# Altium PCB Copy of corePCB2.PcbDoc
Units mil, origin at the board's own origin, x right, y up, seen from the top; angles counter-clockwise.
Board outline 6000 x 4000 mil, 4 copper layers (Top Layer, Layer 1, Layer 2, Bottom Layer), stack 23.756 mil thick; 90 components, 166 nets, 637 pads, 133 vias.
Unrouted connection lines stored in the file: 333.
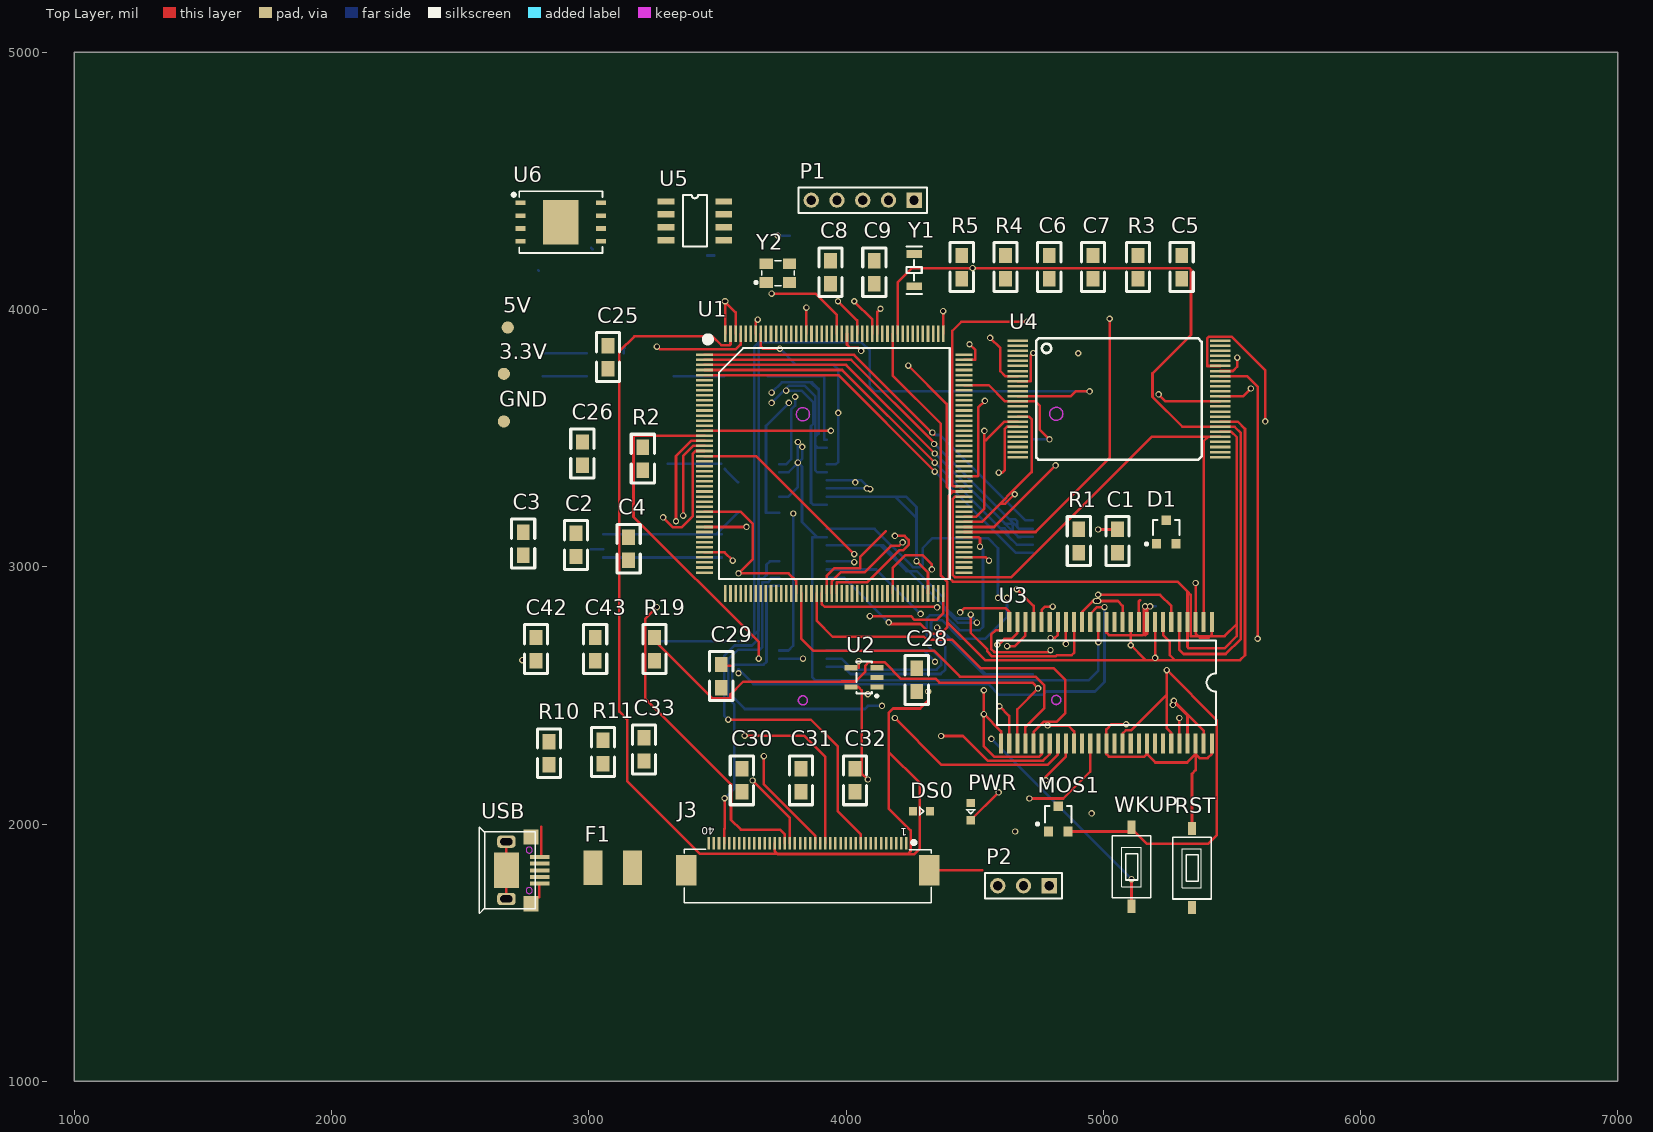
[diagram p0: Top Layer view]
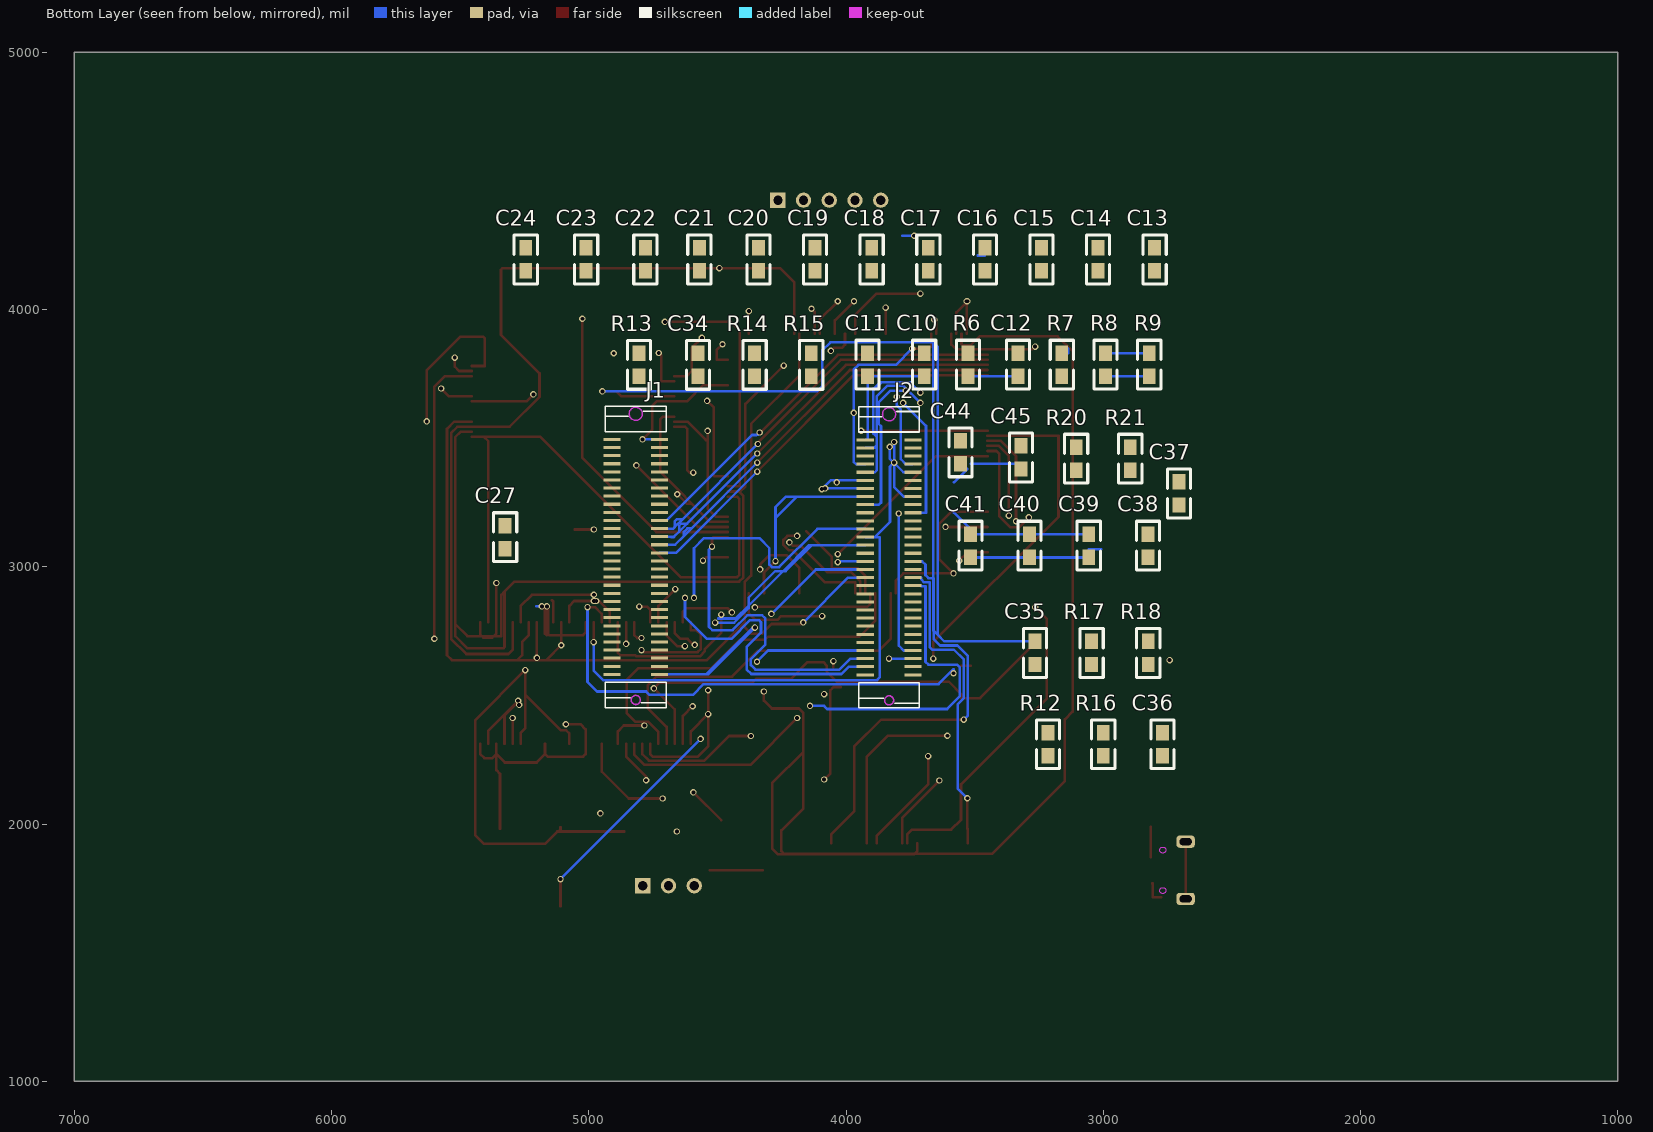
[diagram p1: Bottom Layer view, seen from below]
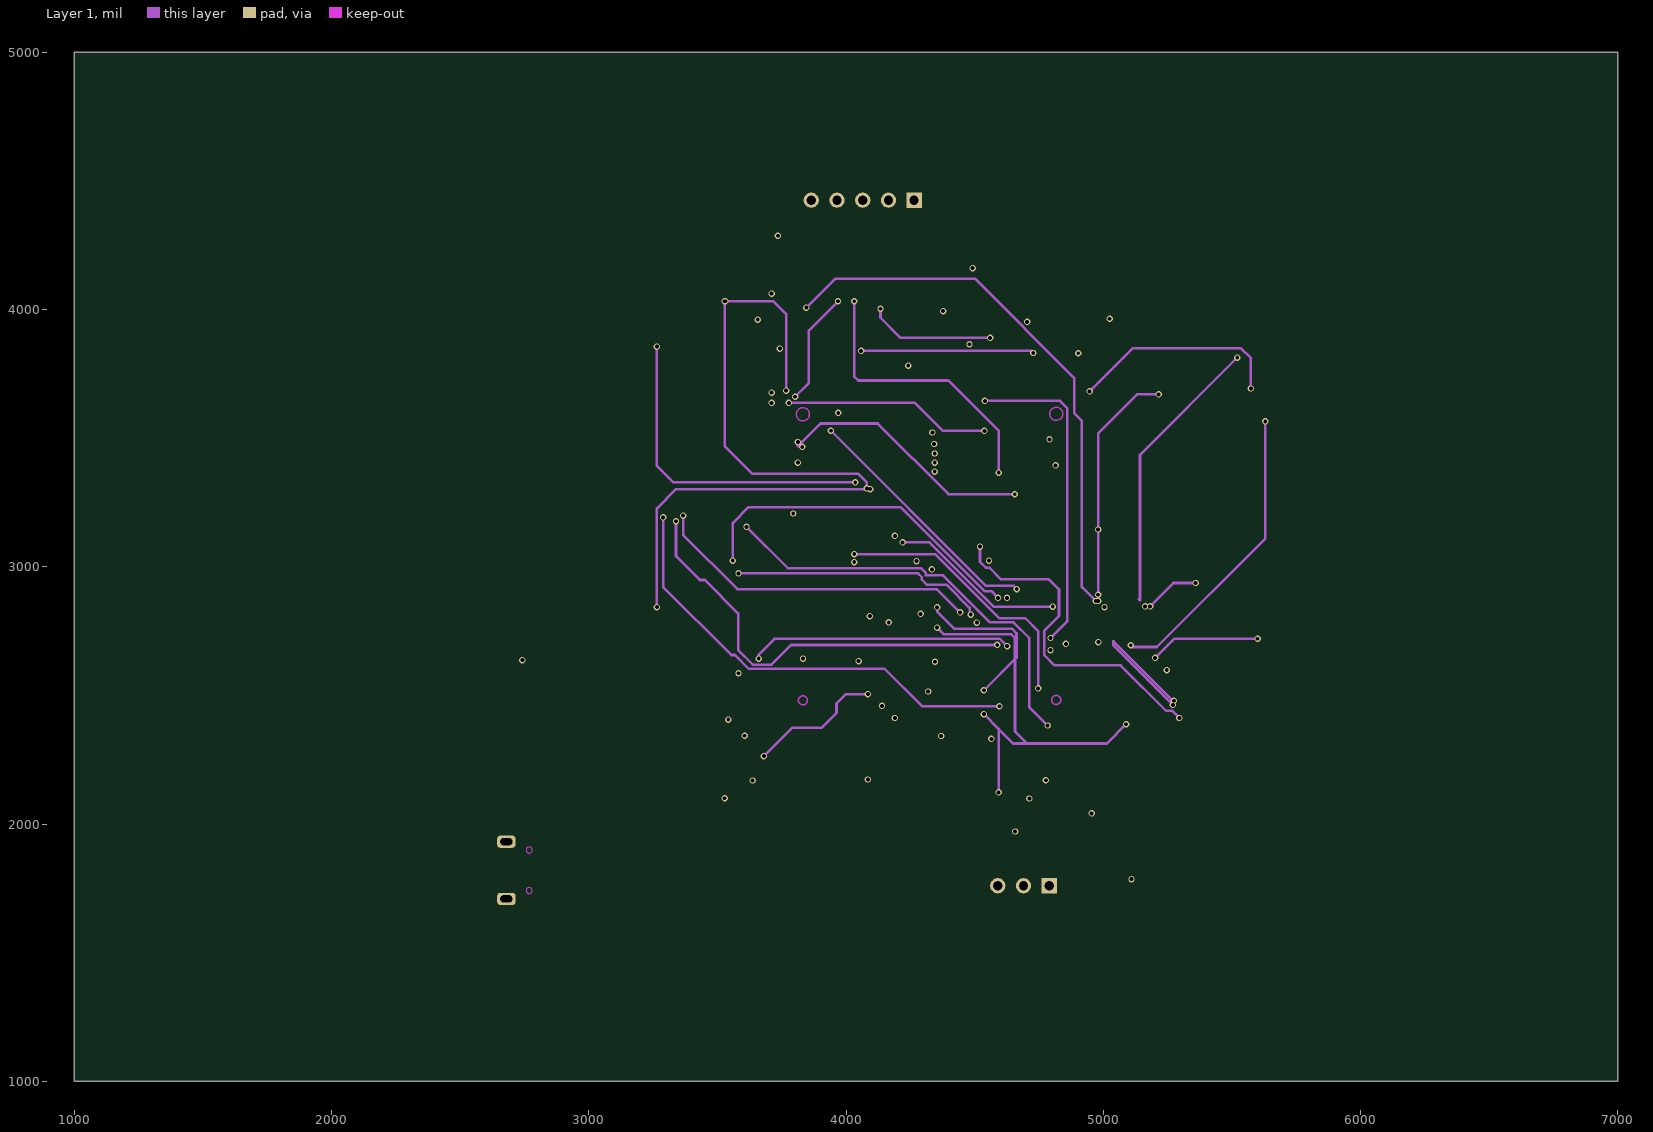
[diagram p2: Layer 1]
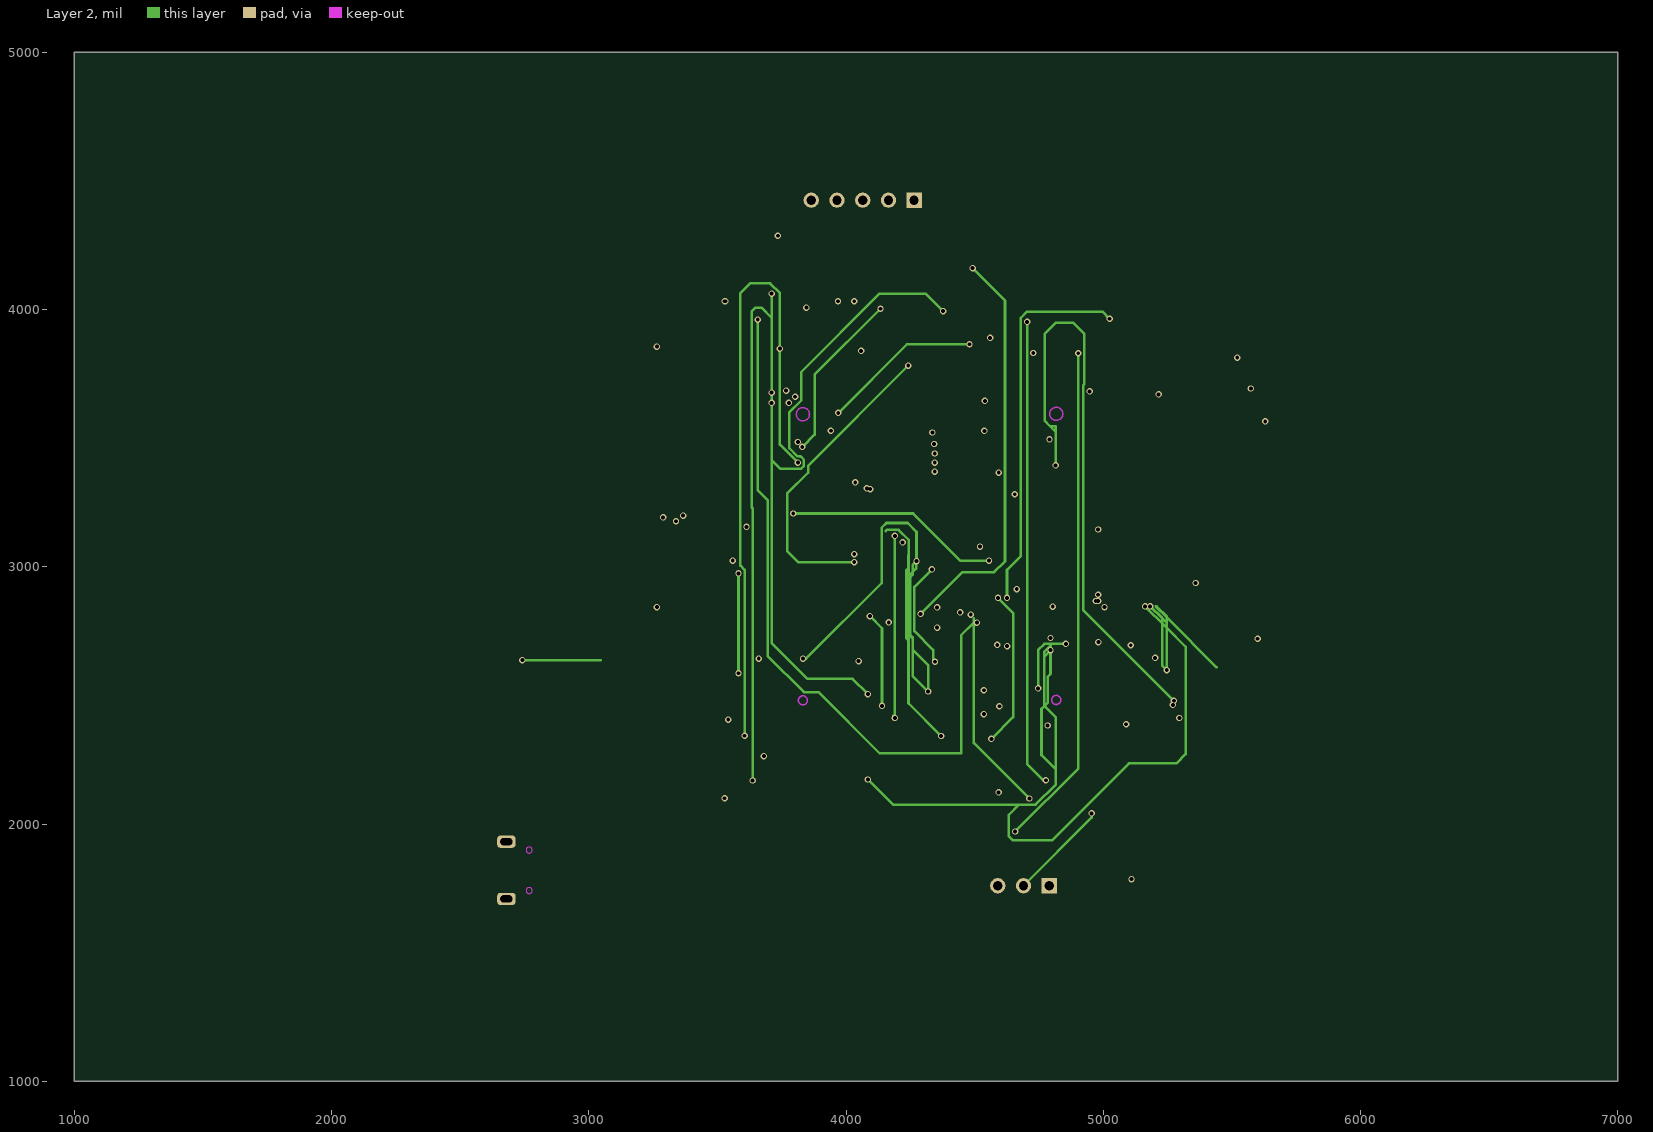
[diagram p3: Layer 2]

## Layer stack, top to bottom
Top Solder: solder mask 0.4, Solder Resist, Dk 3.5
Top Layer: signal copper 1.4
Dielectric 2: prepreg 2.8, PP-006, Dk 4.1
Layer 1: signal copper 1.3779
Dielectric 1: dielectric 12.6, FR-4, Dk 4.8
Layer 2: signal copper 1.3779
Dielectric 3: prepreg 2.8, PP-006, Dk 4.1
Bottom Layer: signal copper 1.4
Bottom Solder: solder mask 0.4, Solder Resist, Dk 3.5

## Board outline
1000,1000 7000,1000 7000,5000 1000,5000

## Design rules (kind name [scope] priority, off if disabled: settings)
Clearance [All] p1: gap=6 ignorepadtopadclearanceinfootprint=TRUE except(0: Arc-Hole Track-Hole SMDPad-Hole THPad-Hole Via-Hole Fill-Hole Poly-Hole Region-Hole Text-Hole)
ComponentClearance [All] p1 off: gap=10 collisioncheckmode=3 verticalgap=10 showdistances=FALSE
DiffPairsRouting [All] p1 off: maxlimit=10 minlimit=10 mostfreqgap=10 toplayer_minwidth=15 toplayer_maxwidth=15 toplayer_prefwidth=15 midlayer1_minwidth=15 midlayer1_maxwidth=15 midlayer1_prefwidth=15 midlayer2_minwidth=15 midlayer2_maxwidth=15 midlayer2_prefwidth=15 bottomlayer_minwidth=15 bottomlayer_maxwidth=15 bottomlayer_prefwidth=15 maxuncoupledlength=500
FanoutControl Fanout_BGA [IsBGA] p1 off: bgadir=Out bgaviamode=Centered fanoutstyle=Auto fanoutdirection=Alternating viagrid=1 // Fanout_BGA (Default Rule)
FanoutControl Fanout_LCC [IsLCC] p2 off: bgadir=Out bgaviamode=Centered fanoutstyle=Auto fanoutdirection=Alternating viagrid=1 // Fanout_LCC (Default Rule)
FanoutControl Fanout_SOIC [IsSOIC] p3 off: bgadir=Out bgaviamode=Centered fanoutstyle=Auto fanoutdirection=Alternating viagrid=1 // Fanout_SOIC (Default Rule)
FanoutControl Fanout_Small [(CompPinCount < 5)] p4 off: bgadir=Out bgaviamode=Centered fanoutstyle=Auto fanoutdirection=OutThenIn viagrid=1 // Fanout_Small (Default Rule)
FanoutControl Fanout_Default [All] p5 off: bgadir=Out bgaviamode=Centered fanoutstyle=Auto fanoutdirection=Alternating viagrid=1 // Fanout_Default (Default Rule)
Height [All] p1 off: minheight=0 maxheight=1000 prefheight=500
PolygonConnect [All] p1: connectstyle=Relief reliefconductorwidth=10 reliefentries=4 polygonreliefangle="90 Angle" airgapwidth=10
RoutingCorners [All] p1 off: cornerstyle=45-Degree minsetback=100 maxsetback=100
RoutingLayers [All] p1 off: top layer_v5=TRUE mid layer 1_v5=TRUE mid layer 2_v5=TRUE bottom layer_v5=TRUE
RoutingPriority [All] p1 off: routingpriority=0
RoutingTopology [All] p1 off: topology=Shortest
RoutingVias [All] p1: holewidth=15 width=25 viastyle="Through Hole" minholewidth=15 minwidth=25 maxholewidth=15 maxwidth=25
SMDToCorner [All] p1: distance=0
SolderMaskExpansion [All] p1: expansion=4
Width [All] p1 off: maxlimit=10 minlimit=10 preferedwidth=10
18 further rules are at their usual default settings.

## Classes and differential pairs
component class stm: C1 C2 C3 C4 C5 C6 C7 C8 C9 C10 C11 C12 C13 C14 C15 C16 C17 C18 C19 C20 C21 C22 C23 C24 C25 C26 C27 D1 J1 J2 P1 R1 R2 R3 R4 R5 R6 R7 R8 R9 RST U1 Y1 Y2
component class mem: C35 C36 C37 C38 C39 C40 C41 C42 C43 C44 C45 R16 R17 R18 R19 R20 R21 U3 U4 U5 U6
component class circuit: 3.3V 5V C28 C29 C30 C31 C32 C33 C34 DS0 F1 GND J3 MOS1 P2 PWR R10 R11 R12 R13 R14 R15 U2 USB WKUP

## Components (designator, comment, footprint, x,y, rotation, side; value= is the part's Value field where it differs from the comment)
3.3V "TEST POINT" TP-1.5 2670,3750 r90 top
5V "TEST POINT" TP-1.5 2685,3930 r0 top
C1 "104" 0805 5055,3055 r90 top
C2 "104" 0805 2950,3040 r90 top
C3 "225" 0805 2745,3045 r90 top
C4 "225" 0805 3155,3025 r90 top
C5 "225" 0805 5305,4120 r90 top
C6 "10uF" 0805 4790,4120 r90 top
C7 "104" 0805 4960,4120 r90 top
C8 "6pF" 0805 3940,4100 r90 top
C9 "6pF" 0805 4110,4100 r90 top
C10 "22pF" 0805 3696.13,3740.59 r90 bottom
C11 "22pF" 0805 3916.13,3740.59 r90 bottom
C12 "104" 0805 3331.13,3740.59 r90 bottom
C13 "104" 0805 2800.13,4150 r90 bottom
C14 "104" 0805 3020.13,4150 r90 bottom
C15 "104" 0805 3240.13,4150 r90 bottom
C16 "104" 0805 3460.13,4150 r90 bottom
C17 "104" 0805 3680.13,4150 r90 bottom
C18 "104" 0805 3900.13,4150 r90 bottom
C19 "104" 0805 4120.13,4150 r90 bottom
C20 "104" 0805 4340.13,4150 r90 bottom
C21 "104" 0805 4570.13,4150 r90 bottom
C22 "104" 0805 4780.13,4150 r90 bottom
C23 "104" 0805 5010.13,4150 r90 bottom
C24 "104" 0805 5245.13,4150 r90 bottom
C25 "104" 0805 3074.94,3770 r90 top
C26 "104" 0805 2975,3395 r90 top
C27 "104" 0805 5325,3070 r90 bottom
C28 "104" 0805 4274.94,2515 r90 top
C29 "10uF" 0805 3514.94,2530 r90 top
C30 "103" 0805 3595,2125 r90 top
C31 "104" 0805 3825,2125 r90 top
C32 "10uF" 0805 4035,2125 r90 top
C33 "104" 0805 3214.94,2245 r90 top
C34 "104" 0805 4575.13,3740 r90 bottom
C35 "104" 0805 3265.13,2620 r90 bottom
C36 "104" 0805 2770.13,2265 r90 bottom
C37 "104" 0805 2705.06,3240 r90 bottom
C38 "104" 0805 2826.45,3036.93 r90 bottom
C39 "104" 0805 3056.45,3036.93 r90 bottom
C40 "104" 0805 3286.45,3036.93 r90 bottom
C41 "104" 0805 3516.45,3036.93 r90 bottom
C42 "104" 0805 2795,2635 r90 top
C43 "104" 0805 3025,2635 r90 top
C44 "104" 0805 3555.13,3400 r90 bottom
C45 "104" 0805 3320.13,3380 r90 bottom
D1 "BAT54C" SOT-23 5245,3130 r0 top
DS0 "LED" SMDLED-0603 4260,2050 r0 top
F1 "1812L075PR" *1812 3093.23,1830 r0 top
GND "TEST POINT" TP-1.5 2670,3565 r90 top
J1 "3710M060046G3FT01" 3710F060046G3FT01 4910,2581.61 r0 bottom
J2 "3710M060046G3FT01" 3710F060046G3FT01 3925.04,2580.04 r0 bottom
J3 "RGBLCD" FPC-TOP40 4234.65,1929 r180 top
MOS1 "SI2301" SO-G3/C2.5 4825,2020 r0 top
P1 "SWD" HDR1X5 4265,4425 r180 top
P2 "USART1" HDR1X3 4790,1760 r180 top
PWR "LED" SMDLED-0603 4485,2081.93 r270 top
R1 "10K" 0805 4905,3055 r90 top
R2 "10R" 0805 3209.94,3375 r90 top
R3 "10R" 0805 5135,4120 r90 top
R4 "0R" 0805 4620,4120 r90 top
R5 "0R" 0805 4450,4120 r90 top
R6 "10K" 0805 3526.13,3740.59 r90 bottom
R7 "100K" 0805 3161.13,3740.59 r90 bottom
R8 "0R" 0805 2991.13,3740.59 r90 bottom
R9 "0R" 0805 2821.13,3740.59 r90 bottom
R10 "1K" 0805 2844.94,2230 r90 top
R11 "10R" 0805 3055,2235 r90 top
R12 "10R" 0805 3215.06,2265 r90 bottom
R13 "10R" 0805 4805.13,3740 r90 bottom
R14 "100K" 0805 4355.13,3740 r90 bottom
R15 "1K" 0805 4135.13,3740 r90 bottom
R16 "0R" 0805 3000.13,2265 r90 bottom
R17 "10K" 0805 3045.13,2620 r90 bottom
R18 "10K" 0805 2825.13,2620 r90 bottom
R19 "10K" 0805 3255,2635 r90 top
R20 "4.7K" 0805 3105.13,3375 r90 bottom
R21 "4.7K" 0805 2895.13,3375 r90 bottom
RST "KEY_M" KEY_SOP3625 5345,1675 r90 top
U1 "STM32F767IGT6" LQFP176 3450,3824.02 r0 top
U2 "CAT6219-330TD" SOT-23-5 4120,2532.6 r180 top
U3 "W9825G6KH" TSOP54 5421.97,2785 r270 top
U4 "MT29F4G08" TSOP48 4667.6,3879.01 r0 top
U5 "24C02" SOP-8 3300.59,4420 r0 top
U6 "W25Q256" WSON8 2891.5,4340 r0 top
USB "USB-AB" "USB_AB - 5S - B" 2595,1820 r90 top
WKUP "KEY_UP" KEY_SOP3625 5110,1680 r90 top
Y1 "32.768KHz" XTAL3215 4265,4090 r90 top
Y2 "25Mhz" XTAL3225 3690,4105 r0 top

## Footprints (in the part's own frame and the unit in brackets; to place one, negate y for a bottom-side part, rotate by r counter-clockwise, add the part's x,y. Pads: shape width x height; smd on the part's side, far side on the other; paste and mask are expansions set on the pad)
0805 [mil]
  rect 60x50 smd: 1(0,-0.06) 2(90,-0.06)
  silkscreen extent -50,-45 140,45
3710F060046G3FT01 [mm]
  rect 1.7x0.3 smd: 1(-4.7,0) 2(-4.7,-0.8) 3(-4.7,-1.6) 4(-4.7,-2.4) 5(-4.7,-3.2) 6(-4.7,-4) 7(-4.7,-4.8) 8(-4.7,-5.6) 9(-4.7,-6.4) 10(-4.7,-7.2) 11(-4.7,-8) 12(-4.7,-8.8) 13(-4.7,-9.6) 14(-4.7,-10.4) 15(-4.7,-11.2) 16(-4.7,-12) 17(-4.7,-12.8) 18(-4.7,-13.6) 19(-4.7,-14.4) 20(-4.7,-15.2) 21(-4.7,-16) 22(-4.7,-16.8) 23(-4.7,-17.6) 24(-4.7,-18.4) 25(-4.7,-19.2) 26(-4.7,-20) 27(-4.7,-20.8) 28(-4.7,-21.6) 29(-4.7,-22.4) 30(-4.7,-23.2) 31(0,-23.2) 32(0,-22.4) 33(0,-21.6) 34(0,-20.8) 35(0,-20) 36(0,-19.2) 37(0,-18.4) 38(0,-17.6) 39(0,-16.8) 40(0,-16) 41(0,-15.2) 42(0,-14.4) 43(0,-13.6) 44(0,-12.8) 45(0,-12) 46(0,-11.2) 47(0,-10.4) 48(0,-9.6) 49(0,-8.8) 50(0,-8) 51(0,-7.2) 52(0,-6.4) 53(0,-5.6) 54(0,-4.8) 55(0,-4) 56(0,-3.2) 57(0,-2.4) 58(0,-1.6) 59(0,-0.8) 60(0,0)
  Keep-Out Layer circle w0.152: c-2.35,-25.725 r0.65
  Keep-Out Layer circle w0.152: c-2.35,2.525 r0.45
  silkscreen extent -5.35,-26.48 0.65,3.27
*1812 [mm]
  rect 1.9x3.4 smd: 1(-1.95,0) 2(1.95,0)
FPC-TOP40 [mm]
  rect 0.25x1.2 smd: 1(0,0.102) 2(0.5,0.102) 3(1,0.102) 4(1.5,0.102) 5(2,0.102) 6(2.5,0.102) 7(3,0.102) 8(3.5,0.102) 9(4,0.102) 10(4.5,0.102) 11(5,0.102) 12(5.5,0.102) 13(6,0.102) 14(6.5,0.102) 15(7,0.102) 16(7.5,0.102) 17(8,0.102) 18(8.5,0.102) 19(9,0.102) 20(9.5,0.102) 21(10,0.102) 22(10.5,0.102) 23(11,0.102) 24(11.5,0.102) 25(12,0.102) 26(12.5,0.102) 27(13,0.102) 28(13.5,0.102) 29(14,0.102) 30(14.5,0.102) 31(15,0.102) 32(15.5,0.102) 33(16,0.102) 34(16.5,0.102) 35(17,0.102) 36(17.5,0.102) 37(18,0.102) 38(18.5,0.102) 39(19,0.102) 40(19.5,0.102)
  rect 2x3 smd: A(-2.25,2.754) B(21.725,2.754)
  silkscreen extent -2.45,-0.15 21.92,5.97
HDR1X3 [mm]
  rect 1.5x1.5 hole 0.9: 1(0,0)
  round 1.5 hole 0.9: 2(2.54,0) 3(5.08,0)
  silkscreen extent -1.27,-1.27 6.35,1.27
HDR1X5 [mm]
  rect 1.5x1.5 hole 0.9: 1(0,0)
  round 1.5 hole 0.9: 2(2.54,0) 3(5.08,0) 4(7.62,0) 5(10.16,0)
  silkscreen extent -1.27,-1.27 11.43,1.27
KEY_SOP3625 [mm]
  rect 1.3x0.8 smd: 1(0,0) 2(7.8,0)
  silkscreen extent 0.85,-1.9 6.95,1.9
LQFP176 [mm]
  rect 1.65x0.254 smd: 1(0,0) 2(0,-0.5) 3(0,-1) 4(0,-1.5) 5(0,-2) 6(0,-2.5) 7(0,-3) 8(0,-3.5) 9(0,-4) 10(0,-4.5) 11(0,-5) 12(0,-5.5) 13(0,-6) 14(0,-6.5) 15(0,-7) 16(0,-7.5) 17(0,-8) 18(0,-8.5) 19(0,-9) 20(0,-9.5) 21(0,-10) 22(0,-10.5) 23(0,-11) 24(0,-11.5) 25(0,-12) 26(0,-12.5) 27(0,-13) 28(0,-13.5) 29(0,-14) 30(0,-14.5) 31(0,-15) 32(0,-15.5) 33(0,-16) 34(0,-16.5) 35(0,-17) 36(0,-17.5) 37(0,-18) 38(0,-18.5) 39(0,-19) 40(0,-19.5) 41(0,-20) 42(0,-20.5) 43(0,-21) 44(0,-21.5) 89(25.631,-21.5) 90(25.631,-21) 91(25.631,-20.5) 92(25.631,-20) 93(25.631,-19.5) 94(25.631,-19) 95(25.631,-18.5) 96(25.631,-18) 97(25.631,-17.5) 98(25.631,-17) 99(25.631,-16.5) 100(25.631,-16) 101(25.631,-15.5) 102(25.631,-15) 103(25.631,-14.5) 104(25.631,-14) 105(25.631,-13.5) 106(25.631,-13) 107(25.631,-12.5) 108(25.631,-12) 109(25.631,-11.5) 110(25.631,-11) 111(25.631,-10.5) 112(25.631,-10) 113(25.631,-9.5) 114(25.631,-9) 115(25.631,-8.5) 116(25.631,-8) 117(25.631,-7.5) 118(25.631,-7) 119(25.631,-6.5) 120(25.631,-6) 121(25.631,-5.5) 122(25.631,-5) 123(25.631,-4.5) 124(25.631,-4) 125(25.631,-3.5) 126(25.631,-3) 127(25.631,-2.5) 128(25.631,-2) 129(25.631,-1.5) 130(25.631,-1) 131(25.631,-0.5) 132(25.631,0)
  rect 0.254x1.65 smd: 45(2.065,-23.566) 46(2.566,-23.566) 47(3.066,-23.566) 48(3.565,-23.566) 49(4.066,-23.566) 50(4.565,-23.566) 51(5.066,-23.566) 52(5.565,-23.566) 53(6.066,-23.566) 54(6.565,-23.566) 55(7.066,-23.566) 56(7.565,-23.566) 57(8.066,-23.566) 58(8.565,-23.566) 59(9.066,-23.566) 60(9.565,-23.566) 61(10.066,-23.566) 62(10.565,-23.566) 63(11.066,-23.566) 64(11.565,-23.566) 65(12.066,-23.566) 66(12.565,-23.566) 67(13.066,-23.566) 68(13.565,-23.566) 69(14.066,-23.566) 70(14.565,-23.566) 71(15.066,-23.566) 72(15.566,-23.566) 73(16.066,-23.566) 74(16.566,-23.566) 75(17.065,-23.566) 76(17.566,-23.566) 77(18.065,-23.566) 78(18.566,-23.566) 79(19.065,-23.566) 80(19.566,-23.566) 81(20.065,-23.566) 82(20.566,-23.566) 83(21.065,-23.566) 84(21.566,-23.566) 85(22.065,-23.566) 86(22.566,-23.566) 87(23.065,-23.566) 88(23.566,-23.566) 133(23.566,2.065) 134(23.065,2.065) 135(22.566,2.065) 136(22.065,2.065) 137(21.566,2.065) 138(21.065,2.065) 139(20.566,2.065) 140(20.065,2.065) 141(19.566,2.065) 142(19.065,2.065) 143(18.566,2.065) 144(18.065,2.065) 145(17.566,2.065) 146(17.065,2.065) 147(16.566,2.065) 148(16.066,2.065) 149(15.566,2.065) 150(15.066,2.065) 151(14.565,2.065) 152(14.066,2.065) 153(13.565,2.065) 154(13.066,2.065) 155(12.565,2.065) 156(12.066,2.065) 157(11.565,2.065) 158(11.066,2.065) 159(10.565,2.065) 160(10.066,2.065) 161(9.565,2.065) 162(9.066,2.065) 163(8.565,2.065) 164(8.066,2.065) 165(7.565,2.065) 166(7.066,2.065) 167(6.565,2.065) 168(6.066,2.065) 169(5.565,2.065) 170(5.066,2.065) 171(4.565,2.065) 172(4.066,2.065) 173(3.565,2.065) 174(3.066,2.065) 175(2.566,2.065) 176(2.065,2.065)
  silkscreen extent 0.04,-22.15 24.22,1.82
SMDLED-0603 [mil]
  rect 32x32 smd: 1(0,0) 2(66.93,0)
  silkscreen extent 26,-17 42,17
SO-G3/C2.5 [mm]
  rect 0.9x0.95 smd: 1(-0.95,-1.25) 2(0.95,-1.25) 3(0,1.25)
  silkscreen extent -2.15,-0.63 1.3,1.25
SOP-8 [mil]
  rect 65x25 smd: 1(0,0) 2(0,-50) 3(0,-100) 4(0,-150) 5(224.41,-150) 6(224.41,-100) 7(224.41,-50) 8(224.41,0)
  silkscreen extent 65,-175 159,25
SOT-23 [mm]
  rect 0.9x0.95 smd: 1(-0.95,-1.048) 2(0.95,-1.048) 3(0,1.302)
  silkscreen extent -2.07,-1.17 1.3,1.3
SOT-23-5 [mil]
  rect 50x20 smd: 1(0,0) 2(0,-37.4) 3(0,-74.8) 4(100,-74.8) 5(100,0)
  silkscreen extent 0,-99 80,35
TP-1.5 [mm]
  round 1.2 smd: 1(0,0)
TSOP48 [mm]
  rect 2x0.25 smd: 1(0,0) 2(0,-0.5) 3(0,-1) 4(0,-1.5) 5(0,-2) 6(0,-2.5) 7(0,-3) 8(0,-3.5) 9(0,-4) 10(0,-4.5) 11(0,-5) 12(0,-5.5) 13(0,-6) 14(0,-6.5) 15(0,-7) 16(0,-7.5) 17(0,-8) 18(0,-8.5) 19(0,-9) 20(0,-9.5) 21(0,-10) 22(0,-10.5) 23(0,-11) 24(0,-11.5) 25(20,-11.5) 26(20,-11) 27(20,-10.5) 28(20,-10) 29(20,-9.5) 30(20,-9) 31(20,-8.5) 32(20,-8) 33(20,-7.5) 34(20,-7) 35(20,-6.5) 36(20,-6) 37(20,-5.5) 38(20,-5) 39(20,-4.5) 40(20,-4) 41(20,-3.5) 42(20,-3) 43(20,-2.5) 44(20,-2) 45(20,-1.5) 46(20,-1) 47(20,-0.5) 48(20,0)
  silkscreen extent 1.83,-11.75 18.17,0.25
TSOP54 [mm]
  rect 2x0.4 smd: 1(0,0) 2(0,-0.8) 3(0,-1.6) 4(0,-2.4) 5(0,-3.2) 6(0,-4) 7(0,-4.8) 8(0,-5.6) 9(0,-6.4) 10(0,-7.2) 11(0,-8) 12(0,-8.8) 13(0,-9.6) 14(0,-10.4) 15(0,-11.2) 16(0,-12) 17(0,-12.8) 18(0,-13.6) 19(0,-14.4) 20(0,-15.2) 21(0,-16) 22(0,-16.8) 23(0,-17.6) 24(0,-18.4) 25(0,-19.2) 26(0,-20) 27(0,-20.8) 28(12,-20.8) 29(12,-20) 30(12,-19.2) 31(12,-18.4) 32(12,-17.6) 33(12,-16.8) 34(12,-16) 35(12,-15.2) 36(12,-14.4) 37(12,-13.6) 38(12,-12.8) 39(12,-12) 40(12,-11.2) 41(12,-10.4) 42(12,-9.6) 43(12,-8.8) 44(12,-8) 45(12,-7.2) 46(12,-6.4) 47(12,-5.6) 48(12,-4.8) 49(12,-4) 50(12,-3.2) 51(12,-2.4) 52(12,-1.6) 53(12,-0.8) 54(12,0)
  silkscreen extent 1.83,-21.2 10.16,0.4
"USB_AB - 5S - B" [mm]
  rect 0.4x1.9 smd: 1(1.3,-5.436) 2(0.65,-5.436) 3(0,-5.436) 4(-0.65,-5.436) 5(-1.3,-5.436)
  rrect50% 1.2x1.8 hole 0.7 slot 1.2 at 90 deg: 6(2.825,-2.15) 7(-2.825,-2.15)
  rect 1.5x1.5 smd: 8(-3.302,-4.572) 9(3.302,-4.572)
  rect 3.5x2.5 smd: 9(0,-2.159)
  Keep-Out Layer circle w0.102: c2,-4.4 r0.3
  Keep-Out Layer circle w0.102: c-2,-4.4 r0.3
  silkscreen extent -4.26,-5 4.26,0.51
WSON8 [mm]
  rect 1x0.45 smd: 1(-3.975,1.905) 2(-3.975,0.635) 3(-3.975,-0.635) 4(-3.975,-1.905) 5(3.975,-1.905) 6(3.975,-0.635) 7(3.975,0.635) 8(3.975,1.905)
  rect 3.5x4.4 smd: 9(0,0)
  silkscreen extent -4.8,-3.05 4.1,3.05
XTAL3215 [mm]
  rect 0.75x1.5 smd: 1(0,0) 2(3.2,0)
  silkscreen extent -0.74,-0.75 3.94,0.75
XTAL3225 [mm]
  rect 1.3x1.05 smd: 1(0,0) 2(2.3,0) 3(2.3,1.85) 4(0,1.85)
  silkscreen extent -1.14,-0.33 2.74,2.17

## Part data
3.3V 5V GND: library part TEST-POINT, "测试点"
C1 C2 C3 C4 C5 C6 C7 C8 C9 C10 C11 C12 C13 C14 C15 C16 C17 C18 C19 C20 C21 C22 C23 C24 C25 C26 C27 C28 C29 C30 C31 C32 C33 C34 C35 C36 C37 C38 C39 C40 C41 C42 C43 C44 C45: library part C
D1: "双肖特基二极管"
F1: "PTC Resettable Fuse 0.75A_hold_ 1.5A_trip_ 13.2VDC 100A 0.8W 0.2s 0.1Ohm SMD Solder Pad 1812 T/R", Package="1812 Littelfuse", Availability=Unavailable, MF="Littelfuse Inc.", MP=1812L075PR, Price=None, SnapEDA_Link=https://www.snapeda.com/parts/1812L075PR/Littelfuse%20Inc./view-part/?ref=snap
J1 J2: library part 3710F, "3710F060046G3FT01"
J3: library part FPC-40, "FPC-40P-0.5mm"
MOS1: library part MOS-P, "IRLML6401/SI2301"
P1: library part "Header 5", "Header, 5-Pin", LatestRevisionDate=17-Jul-2002, LatestRevisionNote="Re-released for DXP Platform.", Publisher="Altium Limited"
P2: library part "Header 3", "Header, 3-Pin", LatestRevisionDate=17-Jul-2002, LatestRevisionNote="Re-released for DXP Platform.", Publisher="Altium Limited"
R1 R2 R3 R4 R5 R6 R7 R8 R9 R10 R11 R12 R13 R14 R15 R16 R17 R18 R19 R20 R21: library part R
U2: "3.3V 500mA LDO"
U3: library part IS42S16160B, "32MB SDRAM"
U4: library part K9F2G08U0C, "256MB NAND FLASH"
U5: library part 24C256, "EEPROM"
U6: library part W25Q128, "W25Q128"
USB: "MicroUSB"
WKUP: library part KEY_M
Y1: library part XTAL, "普通晶振"
Y2: library part XTAL_3225, "3225贴片无源晶振"

## Via types
v1: diameter 25, hole 15, Top Layer to Bottom Layer, 133 vias

## Nets (pads, with @x,y where several pads share a name; then routed paths per layer and width w, separated by ;. In a path a pad name is that pad's centre, name@x,y a point inside that pad or via, vN(x,y) a via of type N, cw(c..) or ccw(c..) an arc to the next point about the centre after c; other vN are vias at no path point)
1WIRE_DQ: J2.4 U1.92 | length 1515.3
  Top Layer w10: U1.92 4543.39,3036.61 v1(4556,3024)
  Layer 2 w10: v1(3795,3207) 4261,3207 4444,3024 v1(4556,3024)
  Bottom Layer w10: J2.4 3776,2674.53 3795,2693.53 v1(3795,3207)
BOOT0: J1.31 R7.1 U1.166
DCMI_D0: J2.16 U1.115
DCMI_D1: J2.17 U1.116
DCMI_D2: J2.18 U1.117
DCMI_D3: J2.19 U1.118
DCMI_D4: J1.39 U1.140
DCMI_D5: J1.36 U1.145
DCMI_D6: J1.26 U1.167
DCMI_D7: J1.27 U1.168
DCMI_HREF: J2.3 U1.85 | length 1150.6
  Top Layer w10: v1(4274,3022) 4318.72,2977.28 U1.85
  Layer 2 w10: v1(3832.95,2643.03) 3845.06,2643.03 4139,2936.97 4139,3152 4157,3170 4240,3170 4274,3136 v1(4274,3022)
  Bottom Layer w10: J2.3 v1(3832.95,2643.03)
DCMI_PLCK: J1.47 U1.52
DCMI_RESET: J1.25 J1.41 U1.138 U1.165
DCMI_SCL: J1.22 U1.162
DCMI_SDA: J1.21 U1.161
DCMI_XCLK: J2.20 U1.119
ETH_MDC: J1.9 U1.33
ETH_MDIO: J1.4 U1.42
FMC_A0: U1.16 U3.23 | length 1624
  Top Layer w10: U1.16 v1(3941.26,3528.74) ; v1(4663.68,2913.37) 4729.05,2848 U3.23
  Layer 1 w10: v1(3941.26,3528.74) 4543.98,2926.02 4651.03,2926.02 v1(4663.68,2913.37)
FMC_A1: U1.17 U3.24 | length 2502.4
  Top Layer w10: U1.17 3174,3509.06 3174,3194 3661,2707 v1(3661,2643) ; v1(4626.42,2691.52) 4656.52,2691.52 4697.56,2732.56 U3.24
  Layer 1 w10: v1(3661,2643) 3661,2659 3721.5,2719.5 4598.45,2719.5 v1(4626.42,2691.52)
FMC_A2: U1.18 U3.25 | length 2204
  Top Layer w10: v1(3339,3177) 3339,3430.74 3397.63,3489.37 U1.18 ; v1(4588,2696) 4592.49,2696 4616,2719.51 4643.51,2719.51 4666.06,2742.06 U3.25
  Layer 1 w10: v1(3339,3177) 3339,3041.18 3431.66,2948.52 3451.48,2948.52 3581,2819 3581,2676 3637.5,2619.5 3710.53,2619.5 3787.03,2696 v1(4588,2696)
FMC_A3: U1.19 U3.26 | length 1850.8
  Top Layer w10: v1(3367,3199) 3367,3430.69 3406,3469.69 U1.19 ; v1(4443.37,2822.5) 4459.37,2838.5 4621.5,2838.5 4634.57,2825.43 U3.26
  Layer 1 w10: v1(3367,3199) 3367,3124 3577.66,2913.34 4352.53,2913.34 v1(4443.37,2822.5)
FMC_A4: U1.20 U3.29 | length 2372.9
  Top Layer w10: v1(3289,3192) 3328,3153 3360,3153 3405,3198 3405,3440 3415,3450 U1.20 ; v1(4596.57,2458) 4634.57,2420 U3.29
  Layer 1 w10: v1(3289,3192) 3289,2922 3554,2657 3568,2657 3621.5,2603.5 4149.5,2603.5 4295,2458 v1(4596.57,2458)
FMC_A5: U1.21 U3.30 | length 2049.7
  Top Layer w10: U1.21 3650.68,3430.32 v1(4032,3049) ; U3.30 4666.06,2446.06 v1(4747,2527)
  Layer 1 w10: v1(4032,3049) 4346.06,3049 4595.06,2800 4696.87,2800 4747,2749.87 v1(4747,2527)
FMC_A6: U1.60 U3.31 | length 1451.9
  Top Layer w10: U1.60 3826.59,2720 3872.59,2674 4342,2674 4443,2573 4736,2573 4771,2538 4771,2450.44 4697.56,2377 U3.31
FMC_A7: U1.63 U3.32 | length 1496.7
  Top Layer w10: U1.63 3885.65,2790.35 3948,2728 4303,2728 4314.5,2716.5 4412.81,2716.5 4524.31,2605 4808,2605 4853,2560 4853,2432 4818,2397 4768,2397 4729.05,2358.05 U3.32
FMC_A8: U1.64 U3.33 | length 1633
  Top Layer w10: U1.64 3905.33,2856 3917.33,2844 4352,2844 v1(4354,2842) ; v1(4536,2520) 4536,2302 4576,2262 4752,2262 4760.55,2270.55 U3.33
  Layer 1 w10: v1(4354,2842) 4354,2826 4420.5,2759.5 4644.5,2759.5 4662.75,2741.25 4662.75,2646.75 v1(4536,2520)
FMC_A9: U1.65 U3.34 | length 2418.9
  Top Layer w10: U1.65 3925.02,2964.02 3955.5,2994.5 4055.5,2994.5 4055.5,3039.27 4155,3138.77 ; v1(4370,2342) 4454.52,2342 4550.52,2246 4766.05,2246 4792.05,2272 U3.34
  Layer 2 w10: 4155,3138.77 4155,3140 4158.5,3143.5 4204.73,3143.5 4244,3104.23 4244,3046.72 ; v1(4370,2342) 4244,2468 ; 4244,2468 4242.71,2469.29 4242.71,2713.64 4234,2722.36 4234,2986 4242.61,2994.61 4242.61,3045.33 4244,3046.72 ; 4244,2468 4244,3046.72
FMC_A10: U1.66 U3.22 | length 1169
  Top Layer w10: U1.66 3944.7,2944 3979.2,2978.5 4071.55,2978.5 4174.29,3081.24 4206.24,3081.24 v1(4220,3095) ; U3.22 4760.55,2832 4773.55,2845 v1(4804,2845)
  Layer 1 w10: v1(4220,3095) 4324,3095 4574,2845 v1(4804,2845)
FMC_A11: U1.67 U3.35 | length 1948.6
  Top Layer w10: U1.67 3964.39,2940 4083.36,2940 4208,3064.64 4222.87,3064.64 4243.5,3085.27 4243.5,3104.73 4228.23,3120 v1(4190,3120) ; v1(4190,2412) 4372,2230 4784,2230 4823.54,2269.54 U3.35
  Layer 2 w10: v1@4183,2419 4190,2426 ; v1(4190,2412) 4190,2426 ; v1(4190,3120) 4190,2426
FMC_A12: U1.106 U3.36 | length 2948.2
  Top Layer w10: U1.106 4415,3312.21 4413,3314.21 4413,3917 4448,3952 v1(4704,3952) ; v1(4777,2170) 4777,2183.96 4855.04,2262 U3.36
  Layer 2 w10: v1(4704,3952) 4704,2233 4767,2170 v1(4777,2170)
FMC_A16_CLE: J2.23 U1.99 U4.16 | length 2052.3
  Top Layer w10: U1.99 4528.41,3174.41 ; v1(4656,3282) 4618.93,3244.93 4600.13,3244.93 4529.6,3174.41 4528.41,3174.41 ; U4.16 4712,3583.74 4722,3573.74 4722,3368 4528.41,3174.41
  Layer 1 w10: v1(3813,3485) 3813,3469 3901,3557 4123,3557 4398,3282 v1(4656,3282)
  Bottom Layer w10: J2.23 3776,3272.95 3813,3309.95 v1(3813,3485)
FMC_A17_ALE: J2.21 U1.100 U4.17 | length 1873.6
  Top Layer w10: U1.100 4506.09,3194.09 4538,3226 4538,3492.05 ; v1(4538,3528) 4538,3492.05 ; U4.17 4617,3564.05 4545,3492.05 4538,3492.05
  Layer 1 w10: v1(3778,3637) 4268,3637 4377,3528 v1(4538,3528)
  Bottom Layer w10: J2.21 3689,3209.96 3689,3548 v1(3778,3637)
FMC_A18: J2.14 U1.101
FMC_BA0: U1.108 U3.20 | length 1693.1
  Top Layer w10: U1.108 4511,3351.58 4514,3354.58 4514,3619 v1(4540,3645) ; v1(4795,2723) 4811,2723 4823.54,2735.54 U3.20
  Layer 1 w10: v1(4540,3645) 4832,3645 4860,3617 4860,2788 v1(4795,2723)
FMC_BA1: U1.109 U3.21
FMC_D0: J2.45 U1.104 U3.2 U4.29 | length 2339.9
  Top Layer w10: U1.104 4423.83,3272.83 4415,3264 4415,2968 4423,2960 4643,2960 5188,3505 5407.47,3505 ; U3.2 5390.47,3488 5407.47,3505 ; U4.29 5407.47,3505
FMC_D1: J2.46 U1.105 U3.4 U4.30 | length 4852.9
  Top Layer w10: v1(4242,3782) 4391,3633 4391,3312 4413.24,3289.76 ; U1.105 4416,3292.52 4413.24,3289.76 ; U4.30 5498.32,3524.68 5519,3504 5519,2777 ; 4413.24,3289.76 4399,3275.52 4399,2959 4416,2942 5289,2942 5327.48,2903.52 ; 5327.48,2903.52 5340,2891 5340,2785 5340,2730 5472,2730 5519,2777 ; 5327.48,2903.52 U3.4 5327.48,2688 5331.48,2684 5473,2684 5519,2730 5519,2777
  Layer 2 w10: v1(4032,3018) 3814,3018 3771,3061 3771,3284 3852.5,3365.5 3852.5,3392.5 v1(4242,3782)
  Bottom Layer w10: J2.46 4029.02,3020.98 v1(4032,3018)
FMC_D2: J2.47 U1.142 U3.5 U4.31 | length 5543.4
  Top Layer w10: U1.142 4200.61,4105.61 4256,4161 v1(4492,4161) 5334.62,4161 5341.06,4154.56 5341.06,3901.69 5191.5,3752.13 5191.5,3660.27 5307.4,3544.37 U4.31 5510.63,3544.37 5535,3520 5535,2720 5476,2661 5312,2661 5295.98,2677.02 U3.5
  Layer 2 w10: v1(4290,2817) 4452,2979 4576,2979 4618,3021 4618,4035 v1(4492,4161)
  Bottom Layer w10: J2.47 4117.51,2989.49 v1(4290,2817)
FMC_D3: J2.48 U1.143 U3.7 U4.32 | length 4177.6
  Top Layer w10: v1(4165.99,2784) 4172.49,2777.5 4289,2777.5 4326.5,2740 4368,2740 4394,2766 4394,2784 ; U1.143 4180.93,3744.07 4369,3556 4369,2966 4394,2941 4394,2784 ; U3.7 5232.99,2734 5259,2707.99 5259,2656 5278,2637 ; U4.32 5522.95,3564.05 5551,3536 5551,2656 5532,2637 5278,2637 ; 4394,2784 4541,2637 5278,2637
  Bottom Layer w10: J2.48 3992,2957.99 v1(4165.99,2784)
FMC_D4: J2.49 U1.68 U3.8 U4.41 | length 1710.4
  Top Layer w10: v1(5201.5,2646) U3.8 ; U4.41 5559.01,3741.22 5600,3700.23 v1(5600,2720)
  Layer 1 w10: v1(5201.5,2646) 5275.5,2720 v1(5600,2720)
FMC_D5: J2.50 U1.69 U3.10 U4.42 | length 1300.9
  Top Layer w10: U3.10 5138.5,2865 5143,2869.5 ; U4.42 5504,3760.9 5521,3777.9 v1(5521,3813)
  Layer 1 w10: 5138.5,2874.5 5143,2879 ; 5143,2869.5 5143,2879 ; v1(5521,3813) 5143,3435 5143,2879
FMC_D6: J2.51 U1.70 U3.11 U4.43 | length 1961.5
  Top Layer w10: U3.11 v1(5107.01,2695) 5161.01,2641 ; U4.43 5404.63,3780.59 5404.63,3888.49 5411.07,3894.94 5498.93,3894.94 5630,3763.86 v1(5630,3565)
  Layer 1 w10: v1(5107.01,2695) 5114.01,2688 5208.01,2688 5630,3109.99 v1(5630,3565)
FMC_D7: J2.52 U1.73 U3.13 U4.44
FMC_D8: J2.53 U1.74 U3.42
FMC_D9: J2.54 U1.75 U3.44
FMC_D10: J2.55 U1.76 U3.45
FMC_D11: J2.56 U1.77 U3.47
FMC_D12: J2.57 U1.78 U3.48 | length 1166.7
  Top Layer w10: U1.78 4180.93,2995.93 4230.5,3045.5 4297.5,3045.5 4334,3009 v1(4334,2990)
  Layer 2 w10: v1(4334,2990) 4266,2922 4266,2749.5 4338.38,2677.12 4338.38,2638.62 v1(4346,2631)
  Bottom Layer w10: J2.57 4302.47,2674.53 v1(4346,2631)
FMC_D13: J2.58 U1.96 U3.50 | length 2755.4
  Top Layer w10: U1.96 4516,3115.35 4521,3110.35 v1(4521,3078.35) ; U3.50 v1(5295.98,2412)
  Layer 1 w10: v1(4521,3078.35) 4521,3019 4543.82,2996.18 4557.82,2996.18 4603,2951 4789,2951 4828,2912 4828,2808.46 4771,2751.46 4771,2656 4810,2617 5067.48,2617 5244.98,2439.5 5268.48,2439.5 v1(5295.98,2412)
  Bottom Layer w10: J2.58 3982.97,2643.03 4026,2600 4352,2600 4370,2618 4370,2641 4314.5,2696.5 4314.5,2800 4326,2811.5 4383.35,2811.5 4440.85,2754 4520,2754 4532.5,2766.5 4532.5,3066.85 v1(4521,3078.35)
FMC_D14: J2.59 U1.97 U3.51 | length 4680.9
  Top Layer w10: U1.97 4737.04,3135.04 5025,3423 v1(5025,3964) ; v1(5271,2463) 5287,2463 5327.48,2422.52 U3.51
  Layer 1 w10: v1(5271,2463) 5040,2694 5040,2710 5271,2479
  Layer 2 w10: v1(4626,2879) 4626,2988 4680,3042 4680,3968 4704,3992 4997,3992 v1(5025,3964)
  Bottom Layer w10: J2.59 3989,2611.54 4017.54,2583 4368,2583 4386,2601 4386,2688.5 4330.5,2744 4330.5,2784 4338.75,2792.25 4372.69,2792.25 4444.94,2720 4540.94,2720 4626,2805.06 v1(4626,2879)
FMC_D15: J2.60 U1.98 U3.53 | length 3003.8
  Top Layer w10: U1.98 4575.72,3154.72 v1(4815,3394) ; v1(5274.47,2479) 5390.47,2363 U3.53
  Layer 2 w10: v1(4815,3394) 4815,3525 ; v1(5274.47,2479) 4923,2830.47 4923,3706 4927,3710 4927,3904 4882,3949 4817,3949 4772,3904 4772,3568 4794,3546 ; 4794,3546 4815,3546 4815,3525 ; 4794,3546 4815,3525
FMC_NBL0: J2.43 U1.169 U3.15 | length 2841.1
  Top Layer w10: U1.169 3669.11,3856 3677.11,3848 v1(3743,3848) ; v1(4981.02,2707) U3.15
  Layer 2 w10: v1(3743,3848) 3743,3475 v1(3813,3405)
  Bottom Layer w10: v1(3813,3405) 3829,3389 3829,3174.47 3888,3115.47 ; J2.43 3888,3115.47 ; v1(4981.02,2707) 4981.02,2596.02 4944.5,2559.5 3879.5,2559.5 3869,2570 3869,3115.47 3888,3115.47
FMC_NBL1: J2.44 U1.170 U3.39 | length 5240.9
  Top Layer w10: U1.170 3649.43,3953.29 v1(3657,3960.86) ; v1(4713,2099) 4844.53,2099 4949.53,2204 U3.39
  Layer 2 w10: v1(3657,3960.86) 3657,3297 3695,3259 3695,2654 3836,2513 3893,2513 4131,2275 4448,2275 4448,2734 v1@4497,2783 ; 4497,2799 v1@4497,2783 ; v1(4713,2099) 4497,2315 4497,2771 ; 4497,2771 v1@4497,2783 ; 4497,2771 v1(4509,2783) v1@4497,2783
  Bottom Layer w10: J2.44 4133.02,3083.98 ; 4497,2799 4429,2799 4378,2850 ; v1(4509,2783) 4434.48,2783 4378,2839.48 4378,2850 ; 4133.02,3083.98 4144.02,3083.98 4245.5,2982.5 ; 4133.02,3083.98 4234.5,2982.5 4245.5,2982.5 ; 4245.5,2982.5 4378,2850 ; 4245.5,2982.5 4275.5,2982.5 4378,2880 4378,2850
FMC_NCE3: R17.2 U1.152 U4.9 | length 944.3
  Top Layer w10: U1.152 4003.76,3863.24 4016,3851 4047,3851 v1(4059,3839) ; U4.9 4719,3721.53 4719,3822 v1(4728,3831)
  Layer 1 w10: v1(4059,3839) 4720,3839 v1(4728,3831)
FMC_NE1: J1.35 U1.151
FMC_NOE: J2.26 U1.146 U4.8 | length 1638.2
  Top Layer w10: U1.146 4121.87,3990.87 v1(4134,4003) ; v1(4560,3890) 4599.78,3850.22 4599.78,3760 4618.56,3741.22 U4.8
  Layer 1 w10: v1(4134,4003) 4134,3968 4212,3890 v1(4560,3890)
  Layer 2 w10: v1(3830,3466) 3878,3514 3878,3747 v1(4134,4003)
  Bottom Layer w10: J2.26 3776.44,3367.44 3830,3421 v1(3830,3466)
FMC_NWAIT: J2.27 U1.150 U4.7 | length 901.7
  Top Layer w10: v1(3969,4032) 4043.13,3957.87 U1.150
  Layer 1 w10: v1(3802,3661) 3856,3715 3856,3919 v1(3969,4032)
  Bottom Layer w10: J2.27 3768,3398.94 3787,3417.94 3787,3612 3802,3627 v1(3802,3661)
FMC_NWE: J2.22 U1.147 U4.18 | length 1501.3
  Top Layer w10: v1(4032,4032) 4102.19,3961.81 U1.147 ; v1(4594,3366) 4608,3366 4617,3375 4617,3536 4625.37,3544.37 U4.18
  Layer 1 w10: v1(4032,4032) 4032,3740 4048,3724 4398,3724 4594,3528 v1(4594,3366)
FMC_SDCKE0: U1.35 U3.37 | length 1976.6
  Top Layer w10: U1.35 v1(3613.28,3154.72) ; v1(4784,2383) 4864,2383 4886.53,2360.47 U3.37
  Layer 1 w10: v1(3613.28,3154.72) 3773.5,2994.5 4292,2994.5 4310.5,2976 4310.5,2966.5 4377.5,2966.5 4560,2784 4652,2784 4712,2724 4712,2455 v1(4784,2383)
FMC_SDCLK: U1.112 U3.38
FMC_SDNCAS: U1.160 U3.17 | length 2361.4
  Top Layer w10: U1.160 v1(3846.28,4007.28) ; U3.17 4918.03,2825.03 4960,2867 v1(4971,2867)
  Layer 1 w10: v1(3846.28,4007.28) 3959,4120 4501,4120 4887,3734 4887,3597 4917,3567 4917,2921 v1(4971,2867)
FMC_SDNE0: R19.2 U1.34 U3.19 | length 2071.8
  Top Layer w10: R19.2 3255.06,2712.94 3479,2489 3551,2489 3551,2504 3600,2553 3983,2553 3984,2554 4037,2554 4075,2592 4075,2616 4088,2629 4149,2629 4214,2564 4349,2564 4363.19,2549.81 4724.19,2549.81 v1(4747,2527) ; v1(4855.04,2699.97) U3.19
  Layer 2 w10: v1(4747,2527) 4747,2675.94 4771.03,2699.97 v1(4855.04,2699.97)
FMC_SDNRAS: U1.59 U3.18 | length 1913
  Top Layer w10: v1(3582,2974) 3776.91,2974 3806.91,2944 U1.59 ; v1(4485,2814) 4485,2743 4548.5,2679.5 4548.5,2672 4568.48,2652.02 4814.52,2652.02 4818.5,2656 4877.53,2656 4886.53,2665 U3.18
  Layer 1 w10: v1(3582,2974) 4280.5,2974 4294.5,2960 4294.5,2950.5 4315.66,2929.34 4392.03,2929.34 4480.91,2840.46 4480.91,2818.09 v1(4485,2814)
FMC_SDNWE: U1.32 U3.16 | length 2700.8
  Top Layer w10: U1.32 3591.22,3213.78 3637,3168 3637,3029 v1(3582,2974) ; U3.16 4949.53,2816.53 4976,2843 v1(5005,2843)
  Layer 2 w10: v1(3582,2586) 3582,2602 v1(3582,2974)
  Bottom Layer w10: v1(3582,2586) 3582,2602 3590,2594 3640.5,2543.5 4553.5,2543.5 4595,2502 4764,2502 4777,2515 4968,2515 5005,2552 v1(5005,2843)
GBC_KEY: J1.15 U1.13
GBC_LED: J1.45 U1.50
GND: C1.2 C2.1 C3.2 C4.1 C5.2 C6.1 C7.1 C8.1 C9.1 C10.1 C11.1 C12.2 C13.1 C14.1 C15.1 C16.1 C17.1 C18.1 C19.1 C20.1 C21.1 C22.1 C23.1 C24.1 C25.1 C26.1 C27.1 C28.1 C29.1 C30.1 C31.1 C32.1 C33.2 C34.2 C35.1 C36.1 C37.1 C38.1 C39.1 C40.1 C41.1 C42.1 C43.1 C44.2 C45.2 GND.1 J1.1 J1.30 J2.31 J3.3 J3.4 J3.5 J3.11 J3.12 J3.13 J3.20 J3.21 J3.22 J3.23 J3.29 J3.A J3.B P1.1 P2.3 PWR.2 R1.2 R4.2 R7.2 R14.1 RST.2 U1.14 U1.22 U1.37 U1.61 U1.71 U1.90 U1.102 U1.113 U1.126 U1.135 U1.148 U1.158 U2.2 U3.6 U3.12 U3.28 U3.41 U3.46 U3.52 U3.54 U4.13 U4.36 U5.1 U5.2 U5.3 U5.4 U5.7 U6.4 USB.5 USB.6 USB.7 USB.8 USB.9 Y2.2 Y2.4 | length 7571.6
  Top Layer w10: USB.7 2680,1708.78 2680,1820 2680,1931.22 USB.6 ; USB.8@2775,1716 2807,1716 2807,1768.82 USB.5 ; J3.A 4323.23,1821 4529,1821 ; U1.126 4555,3705.91 4618.11,3642.79 U4.13 4736,3642.79 4754,3624.79 4754,3532 v1(4791,3495) ; PWR.2 v1(4593,2123) ; v1(4536,2427) 4603.07,2359.93 U3.28 ; v1(4980,2867) 5056.51,2867 5075.51,2848 U3.12 ; v1(4980,2891) 5221.49,2891 5264.49,2848 U3.6 ; v1(4980,3145) C1.2 ; v1(5089,2388) 5032.52,2388 5012.52,2368 U3.41 5012.52,2272 5022.52,2262 5160,2262 5170,2272 ; U3.46 5170,2272 ; v1(5215,3670) 5242.21,3642.79 U4.36 ; RST.2 5345,2195.05 5358.98,2209.02 5358.98,2272 ; U3.52 5358.98,2272 ; U3.54 5421.97,2272 5405.97,2256 5374.98,2256 5358.98,2272 ; 5170,2272 5203,2239 5325.98,2239 5358.98,2272
  Layer 1 w10: v1(4354,2763.5) 4379.5,2738 4642,2738 4657,2723 4657,2360 4704,2313 ; v1(4536,2427) 4593,2370 ; v1(4593,2123) 4593,2370 ; v1(4980,2867) v1(4980,2891) v1(4980,3145) 4980,3518 5132,3670 v1(5215,3670) ; v1(5089,2388) 5014,2313 4704,2313 ; 4593,2370 4650,2313 4704,2313
  Bottom Layer w10: C13.1@2803.03,4152.97 C13.1@2806,4150 ; 3007.38,3068.62 3056.38,3068.62 ; C39.1 3056.38,3036 3286.38,3036 3516.38,3036 C41.1 ; 3136,3830.59 3136,3847 R7.2@3140.33,3851.33 ; C10.1 3696.07,3740 C11.1@3916.07,3740 ; C11.1 C11.1@3916.07,3740 ; J2.31 3916.07,3493.43 C11.1@3916.07,3740 ; v1(4354,2763.5) 4535.89,2581.61 4544.39,2581.61 ; v1@4354,2772 4544.39,2581.61 ; J1.1 4544.39,2581.61 ; J1.30 v1(4791,3495)
IIC_SCL: J1.8 R20.1 U1.45 U5.6
IIC_SDA: J1.7 R21.1 U1.46 U5.5
JTCK: J1.42 P1.2 U1.137
JTMS: J1.43 P1.3 U1.124
KEY0: J1.6 U1.44
KEY1: J1.5 U1.43
KEY2: J1.28 U1.8
LCD_B3: J2.35 J3.24 U1.154 | length 3564.3
  Top Layer w10: v1(3637,2169) 3781.89,2024.11 J3.24 ; v1(3711,4062) 3881.39,4062 3964.39,3979 U1.154
  Layer 2 w10: v1(3637,2169) 3637,3227 3633,3231 3633,3992 3648,4007 3672,4007 3711,3968 ; v1(3711,3637) 3711,3968 ; v1(3711,4062) 3711,3968
  Bottom Layer w10: v1(3711,3637) 3777,3703 3840,3703 3880,3663 3880,3375.44 3888,3367.44 J2.35
LCD_B4: J2.36 J3.25 U1.173 | length 4329.9
  Top Layer w10: v1(3265,2843) 3219,2797 3219,2488 3553,2154 3553,2016 3591,1978 3744,1978 3762.2,1959.8 J3.25 ; v1(3265,3856) 3275.15,3845.85 3572.23,3845.85 3590.37,3864 U1.173
  Layer 1 w10: v1(3265,2843) 3265,3227 3340,3302 v1(4094,3302) ; v1(3265,3856) 3265,3392 3329,3328 v1(4036,3328)
  Bottom Layer w10: J2.36 4028.06,3335.94 v1(4036,3328) 4036,3335.94 4060.06,3335.94 v1(4094,3302)
LCD_B5: J2.37 J3.26 U1.174 | length 1498.3
  Top Layer w10: v1(3528,4032) 3570.69,3989.31 U1.174
  Layer 1 w10: v1(3528,4032) 3528,3469 3636,3361 4048,3361 4081,3328 v1(4081,3304.45)
  Bottom Layer w10: J2.37 v1(4081,3304.45)
LCD_B6: J2.38 J3.27 U1.175 | length 6789.2
  Top Layer w10: U1.175 3551,3864.86 3548,3861.85 3515,3861.85 3480.85,3896 3177,3896 3119,3838 3119,2437 3149,2407 3149,2168 3433,1884 3734,1884 ; J3.27 3722.83,1895.17 3734,1884 ; v1(4319,2515) 4319,2480 4288,2449 4183,2449 4166,2432 4166,2280 ; 3734,1884 4240,1884 4251,1895 4251,1975 4166,2060 4166,2280 ; 3734,1884 3736,1882 4265,1882 4287,1904 4287,2159 4166,2280
  Layer 2 w10: v1(4274,3022) v1@4273,3021 ; 4250,2734 4250,2730 4258.71,2721.29 ; 4250,2734 4258.71,2725.29 4258.71,2721.29 ; 4250,2734 4250,2961 ; 4250,2961 4250,2970 4259,2979 ; 4250,2961 4259,2970 4259,2979 ; 4258.71,2721.29 4259,2721 4259,2677.71 ; 4258.71,2721.29 4258.71,2678 4259,2677.71 ; 4259,2677.71 4319,2617.71 v1(4319,2515) 4259,2575 4259,2677.71 ; 4259,2979 4273,2993 v1@4273,3021 ; 4259,2979 4259,3007 v1@4273,3021
  Bottom Layer w10: J2.38 4191.05,3272.95 ; v1(4274,3022) 4274,3190 ; 4191.05,3272.95 4233.05,3272.95 4274,3232 4274,3190 ; 4191.05,3272.95 4274,3190
LCD_B7: J2.39 J3.28 U1.176 | length 1263.3
  Top Layer w10: U1.176 v1(3531.32,4032)
  Layer 1 w10: v1(3531.32,4032) 3718,4032 3767,3983 v1(3767,3685)
  Bottom Layer w10: v1(3767,3685) 3827,3685 3873,3639 3873,3556 3864,3547 3864,3249.46 3872,3241.46 J2.39
LCD_BL: J1.23 J3.34 U1.163
LCD_CLK: J3.30 U1.111
LCD_DE: J3.33 U1.28
LCD_G2: J2.30 J3.14 U1.128
LCD_G3: J2.29 J3.15 U1.129
LCD_G4: J2.28 J3.16 U1.130
LCD_G5: J2.34 J3.17 U1.131 | length 4216.3
  Top Layer w10: v1(3606,2343) 3838,2343 3919.69,2261.31 J3.17 ; U1.131 4503,3804.33 4503,3842 v1(4480,3865)
  Layer 2 w10: v1(3606,2343) 3606,2988 3589,3005 3589,4064 3627,4102 3705,4102 3743,4064 v1(3743,3848) ; v1(3970,3598) 4237,3865 v1(4480,3865)
  Bottom Layer w10: v1(3743,3848) 3806,3785 3952,3785 3970,3767 v1(3970,3598) 3970,3408 3960.94,3398.94 J2.34
LCD_G6: J2.33 J3.18 U1.132
LCD_G7: J2.32 J3.19 U1.133 | length 4302.6
  Top Layer w10: v1(3681,2264) 3681,2154 3880.32,1954.68 J3.19 ; U1.133 v1(4377.78,3994)
  Layer 1 w10: v1(3681,2264) 3792,2375 3906,2375 3963,2432 3963,2468 4000,2505 v1(4085,2505)
  Layer 2 w10: v1(3711,3677) 3711,3414.5 ; v1(4085,2505) 4026,2564 3850,2564 3711,2703 3711,3414.5 ; v1(4377.78,3994) 4309.78,4062 4131,4062 3826,3757 3826,3647 3779.96,3600.96 3779.96,3460.66 3811.63,3429 3822,3429 3823,3428 3824.5,3428 3836.5,3416 3836.5,3392 3826,3381.5 3744,3381.5 3711,3414.5
  Bottom Layer w10: v1(3711,3677) 3751,3717 3862,3717 ; J2.32 3891,3461.93 ; 3862,3717 3868,3717 3894,3691 3894,3685 ; 3862,3717 3894,3685 ; 3880,3472.93 3880,3504 ; 3880,3472.93 3880,3469.93 3888,3461.93 3891,3461.93 ; 3880,3472.93 3891,3461.93 ; 3880,3504 3880,3511 3894,3525 ; 3880,3504 3894,3518 3894,3525 ; 3894,3525 3894,3685
LCD_HSYNC: J3.31 U1.12
LCD_R3: J2.10 J3.6 U1.86
LCD_R4: J2.11 J3.7 U1.87
LCD_R5: J2.12 J3.8 U1.88 | length 1954.5
  Top Layer w10: v1(4093,2808) 4252.5,2808 4267,2793.5 4352.28,2793.5 4377.78,2819 U1.88
  Layer 2 w10: v1(4093,2808) 4140,2761 v1(4140,2459)
  Bottom Layer w10: J2.12 3707,2926.5 3707,2923.68 3691,2923.68 3691,2630.5 3680,2619.5 3568,2619.5 3558,2609.5 3558,2496 3607,2447 4073,2447 4085,2459 v1(4140,2459)
LCD_R6: J2.24 J3.9 U1.89
LCD_R7: J2.15 J3.10 U1.110 | length 1665.4
  Top Layer w10: v1(3542,2406) 3863,2406 3968,2301 3968,2049.48 4057.48,1960 J3.10
  Bottom Layer w10: v1(3542,2406) 3526,2422 3526,2653 3567,2694 3634.37,2694 3659,2718.63 3659,2955.68 3679.53,2955.68 3691,2967.14 3691,3008 3703.98,3020.98 J2.15
LCD_VSYNC: J3.32 U1.11
LED0: DS0.2 J1.57 U1.57
LED1: J1.56 U1.56
NetC1_1: C1.1 D1.3 U1.6
NetC2_2: C2.2 C4.2 R2.1 U1.38
NetC3_1: C3.1 U1.81
NetC5_1: C5.1 U1.125
NetC8_2: C8.2 U1.9 Y1.1
NetC9_2: C9.2 U1.10 Y1.2
NetC10_2: C10.2 U1.30 Y2.1
NetC11_2: C11.2 U1.29 Y2.3 | length 45.6
  Bottom Layer w10: v1(3735,4287) 3780.55,4287
NetC28_2: C28.2 J3.1
NetC29_2: C29.2 F1.2 U2.1 U2.3 | length 36
  Top Layer w10: C29.2@3515,2615 3551,2615
NetC30_2: C30.2 U2.4 | length 25.6
  Top Layer w10: 4049,2607.4 v1(4049,2633)
NetC35_2: C35.2 C36.2 R16.1 U4.12 U4.37 | length 5372.5
  Top Layer w10: U4.12 4873.48,3662.48 4893,3682 v1(4947,3682) ; U4.37 5543.48,3662.48 v1(5574,3693)
  Layer 1 w10: v1(4947,3682) 5114,3849 5536,3849 5574,3811 v1(5574,3693)
  Bottom Layer w10: C35.2 3618,2710 3643,2735 ; v1(4947,3682) 4112,3682 4093,3701 4093,3840 4061,3872 3660,3872 ; 3643,2735 3660,2752 3660,3872 ; 3643,2735 3643,3855 3660,3872
NetDS0_1: DS0.1 R10.2
NetMOS1_1: MOS1.1 R13.2 R14.2 | length 1961
  Layer 2 w10: v1(4657.21,1970.79) 4903,2216.58 v1(4903,3830)
NetPWR_1: PWR.1 R15.1
NetR1_1: R1.1 U1.48
NetR4_1: R4.1 R5.1 U1.171
NetR11_2: R11.2 USB.3
NetR12_2: R12.2 USB.2
NetR18_1: R18.1 U4.19 | length 305
  Layer 2 w10: v1(2742,2637) 3047,2637
NRF_CE: J2.25 U1.155
NRF_CS: J1.34 U1.153
PA0: J2.42 U1.40 WKUP.1 | length 3978
  Top Layer w10: U1.40 3527.7,3056.3 v1(3560,3024) ; WKUP.1 v1(5110,1786)
  Layer 1 w10: v1(3560,3024) 3560,3171 3621,3232 4212,3232 4539,2905 4565,2905 v1(4591,2879)
  Layer 2 w10: v1(4565,2331) 4650,2416 4650,2820 v1(4591,2879)
  Bottom Layer w10: J2.42 4111.53,3146.97 4260,2998.5 4288.5,2998.5 4298,3008 4298,3072 4337,3111 4552,3111 4591,3072 v1(4591,2879) ; v1(4565,2331) v1(5110,1786)
PA1: J1.3 U1.41
PA3: J1.44 U1.47
PA5: J1.46 U1.51
PA7: J1.48 U1.53
PA9: J1.51 P2.1 U1.120
PA10: J1.52 P2.2 U1.121 | length 390.8
  Layer 2 w10: P2.2 4955,2025 v1(4955,2041)
PA11: J1.53 R11.1 U1.122
PA12: J1.54 R12.1 U1.123
PB2: J1.55 U1.58 U6.6
PB6: J1.24 U1.164 U6.1
PB10: J2.2 U1.79
PB11: J2.1 U1.80
PB13: J2.5 U1.93
PB14: J2.6 U1.94
PB15: J2.7 U1.95
PC4: J1.49 U1.54
PC5: J1.50 U1.55
PC10: J1.40 U1.139
PC12: J1.38 U1.141
PD2: J1.37 U1.144
PE2: J1.20 U1.1 | length 1564.4
  Top Layer w10: U1.1 3979.02,3824.02 3979.33,3823.7 4031.36,3823.7 v1@4342.53,3512.53
  Bottom Layer w10: v1@4342.53,3512.53 4335.96,3519.11 v1(4335.96,3522.03) 4337.97,3522.03 4338.7,3521.3 4347.87,3512.13 4365.31,3512.13 4697.4,3180.04 J1.20
PE3: J1.19 U1.2 | length 1613.5
  Top Layer w10: U1.2 4020.42,3804.33 v1@4347.38,3477.38
  Bottom Layer w10: J1.19 4671.46,3148.54 4665.98,3154.02 ; v1@4347.38,3472.62 4345,3475 4347.38,3477.38 v1@4347.38,3472.62 ; v1@4347.38,3472.62 4634.53,3185.47 ; 4634.53,3185.47 4665.98,3154.02 ; 4634.53,3185.47 4656.51,3185.47 4665.98,3176 4665.98,3154.02
  other v1: 4342.53,3477.38
PE4: J1.18 U1.3 | length 2052.5
  Top Layer w10: U1.3 4000.73,3784.65 v1(4345,3440.38)
  Bottom Layer w10: v1(4345,3440.38) v1@4345.19,3440.19 ; v1@4345.19,3440.19 4345,3440 4648.18,3136.82 ; v1@4345.19,3440.19 4617.71,3167.67 4640,3167.67 4648.18,3159.49 4648.18,3136.82 ; 4648.18,3136.82 4667.95,3117.05 ; 4667.95,3117.05 4670,3115 4680,3115 4681.14,3116.14 4724.05,3116.14 J1.18 4667.95,3117.05
PE5: J1.17 U1.4 | length 1606.6
  Top Layer w10: U1.4 3985.04,3764.96 v1(4345,3405)
  Bottom Layer w10: v1(4345,3405) 4600.77,3149.23 ; J1.17 4664.45,3085.55 4629.74,3120.26 ; 4600.77,3149.23 4629.74,3120.26 ; 4600.77,3149.23 4616.51,3149.23 4629.74,3136 4629.74,3120.26
PE6: J1.16 U1.5 | length 2008.6
  Top Layer w10: U1.5 3970,3745.28 v1@4345,3370.28
  Bottom Layer w10: J1.16 4661.22,3054.06 ; 4661.22,3054.06 4660.94,3054.06 v1(4345,3370) 4345,3370.28 4661.22,3054.06
PF6: J1.14 U1.24 U6.7
PF7: J1.13 U1.25 U6.3
PF8: J1.12 U1.26 U6.5
PF9: J1.11 U1.27 U6.2
PG3: J2.13 J3.37 U1.107 | length 1222.3
  Top Layer w10: J3.37 3525.98,1980 3528,1982.02 v1(3528,2100)
  Bottom Layer w10: v1(3528,2100) 3566,2138 3566,2465 3542,2489 3542,2638.83 3581.17,2678 3665,2678 3675,2688 3675,2939.68 3696,2939.68 3707,2950.68 3707,2957.99 J2.13
PG13: J1.33 U1.156
PG14: J1.32 U1.157
PH6: J2.8 J3.38 U1.83
PH7: J2.9 J3.39 U1.84
PI3: J2.41 J3.36 U1.134
PI8: J2.40 J3.35 U1.7
RESET: C12.1 J1.10 J3.40 P1.5 R6.1 RST.1 U1.31 | length 196.2
  Bottom Layer w10: C12.1 3331.07,3740 3526.07,3740 R6.1
VBAT: D1.2 J1.29
VCC: R16.2 R20.2 R21.2
VCC3.3: 3.3V.1 C31.2 C32.2 C37.2 C38.2 C39.2 C40.2 C41.2 C42.2 C43.2 C44.1 C45.1 MOS1.2 P1.4 R6.2 R8.1 R9.1 R17.1 R18.2 R19.1 U2.5 U3.1 U3.3 U3.9 U3.14 U3.27 U3.43 U3.49 U5.8 U6.8 WKUP.2 | length 9379.6
  Top Layer w10: U2.5 4048.4,2532.6 4061,2520 4061,2197 v1(4085,2173) ; U3.27 4603.07,2754 4582.5,2754 4564.5,2736 4564.5,2680 4576.48,2668.02 4787.02,2668.02 v1(4795,2676) ; MOS1.2 WKUP.2@5117.21,1970.79 ; U3.14 5012.52,2744 5022.52,2734 5153,2734 5158,2739 v1@5158,2841 ; U3.43 5075.51,2352 5087.51,2364 5108,2364 5247,2503 ; WKUP.2 5110,1978 WKUP.2@5117.21,1970.79 ; v1(5163,2846) 5163,2733 5170,2740 U3.9 5170,2834 v1(5182,2846) ; U3.49 5264.49,2354 5247,2371.49 5247,2503 ; v1(5358.98,2937) U3.3 5358.98,2741.02 5376,2724 5409.97,2724 5421.97,2736 U3.1 ; WKUP.2@5117.21,1970.79 5122.21,1970.79 5170,1923 5408,1923 5441,1956 5441,2404 v1(5247,2598) 5247,2503
  Layer 1 w10: v1(5182,2846) 5273,2937 v1(5358.98,2937)
  Layer 2 w10: v1(4085,2173) 4183,2075 4672,2075 ; v1@5158,2841 v1(5163,2846) ; 5204,2846 5247,2803 ; 5207,2846 5247,2806 5247,2803 ; 5441,2609 5247,2803 ; 4672,2075 4737,2075 4816,2154 4816,2212 ; 4672,2075 4633,2036 4633,1952 4649,1936 4800,1936 5100,2236 5284,2236 5320,2272 5320,2689 5247,2762 ; 4760,2447 4771.5,2458.5 ; 4760,2447 4760,2268 4816,2212 ; 4760,2447 4760,2448 4771,2459 ; 4771,2459 4771,2652 ; 4771,2459 4771.5,2458.5 ; 4771,2652 4771,2670 4786,2685 4795,2694 v1(4795,2676) ; 4771,2652 v1(4795,2676) ; 4771.5,2458.5 4784,2471 4784,2572 4795,2583 v1(4795,2676) ; 4771.5,2458.5 4816,2414 4816,2212 ; v1(5163,2846) 5172.5,2836.5 5230,2779 ; v1(5163,2846) v1(5182,2846) ; v1(5182,2846) 5230,2798 ; v1(5182,2846) 5184,2846 5230,2800 5230,2798 ; 5230,2779 5247,2762 ; 5230,2779 5230,2798 ; 5230,2779 5230,2615 v1(5247,2598) 5247,2762 ; 5230,2798 5247,2781 ; 5247,2762 5247,2781 ; 5247,2781 5247,2803
  Bottom Layer w10: R9.1 2821.07,3740 2991.07,3740 R8.1 ; C39.2 3056.38,3127 3286.38,3127 C40.2 3286.38,3126 3516.38,3126 C41.2 ; C45.1@3308,3400 3320.06,3400 3515,3400 ; C41.2@3496.93,3126.93 3506.66,3136.66 3581,3211 ; 3529,3380 3532.03,3376.97 3581,3328 ; v1(5163,2846) v1(5182,2846) 5204,2846
VCC3.3M: C13.2 C14.2 C15.2 C16.2 C17.2 C18.2 C19.2 C20.2 C21.2 C22.2 C23.2 C24.2 C25.2 C26.2 C27.2 D1.1 R3.2 R5.2 R8.2 R9.2 U1.15 U1.23 U1.36 U1.49 U1.62 U1.72 U1.82 U1.91 U1.103 U1.114 U1.127 U1.136 U1.149 U1.159 U1.172 | length 206.9
  Bottom Layer w10: R9.2 2821.07,3830 2991.07,3830 R8.2 ; C14.2@3009,4240 C14.2@3014.53,4234.47 ; C16.2@3460.06,4210 3488,4210
VCC5: 5V.1 C33.1 F1.1 J1.58 J1.59 J1.60 J3.2 USB.1 | length 118.8
  Top Layer w10: USB.1@2816,1871.18 2816,1990
VCC_LED: C34.1 MOS1.3 R10.1 R15.2
VDDA: C6.2 C7.2 R2.2 R3.1 U1.39
VREF+: J1.2 R13.1
pads on no net: U3.40 U4.1 U4.2 U4.3 U4.4 U4.5 U4.6 U4.10 U4.11 U4.14 U4.15 U4.20 U4.21 U4.22 U4.23 U4.24 U4.25 U4.26 U4.27 U4.28 U4.33 U4.34 U4.35 U4.38 U4.39 U4.40 U4.45 U4.46 U4.47 U4.48 U6.9 USB.4

## Text inside footprints (layer, text, board x,y; h text height)
J3: Top Overlay "1" at 4238.65,1984 h30 r180; Top Overlay "40" at 3490.65,1988 h30 r180